# EAGLE board FinalSchematic1.0-Bigger (EAGLE 9.6.2)
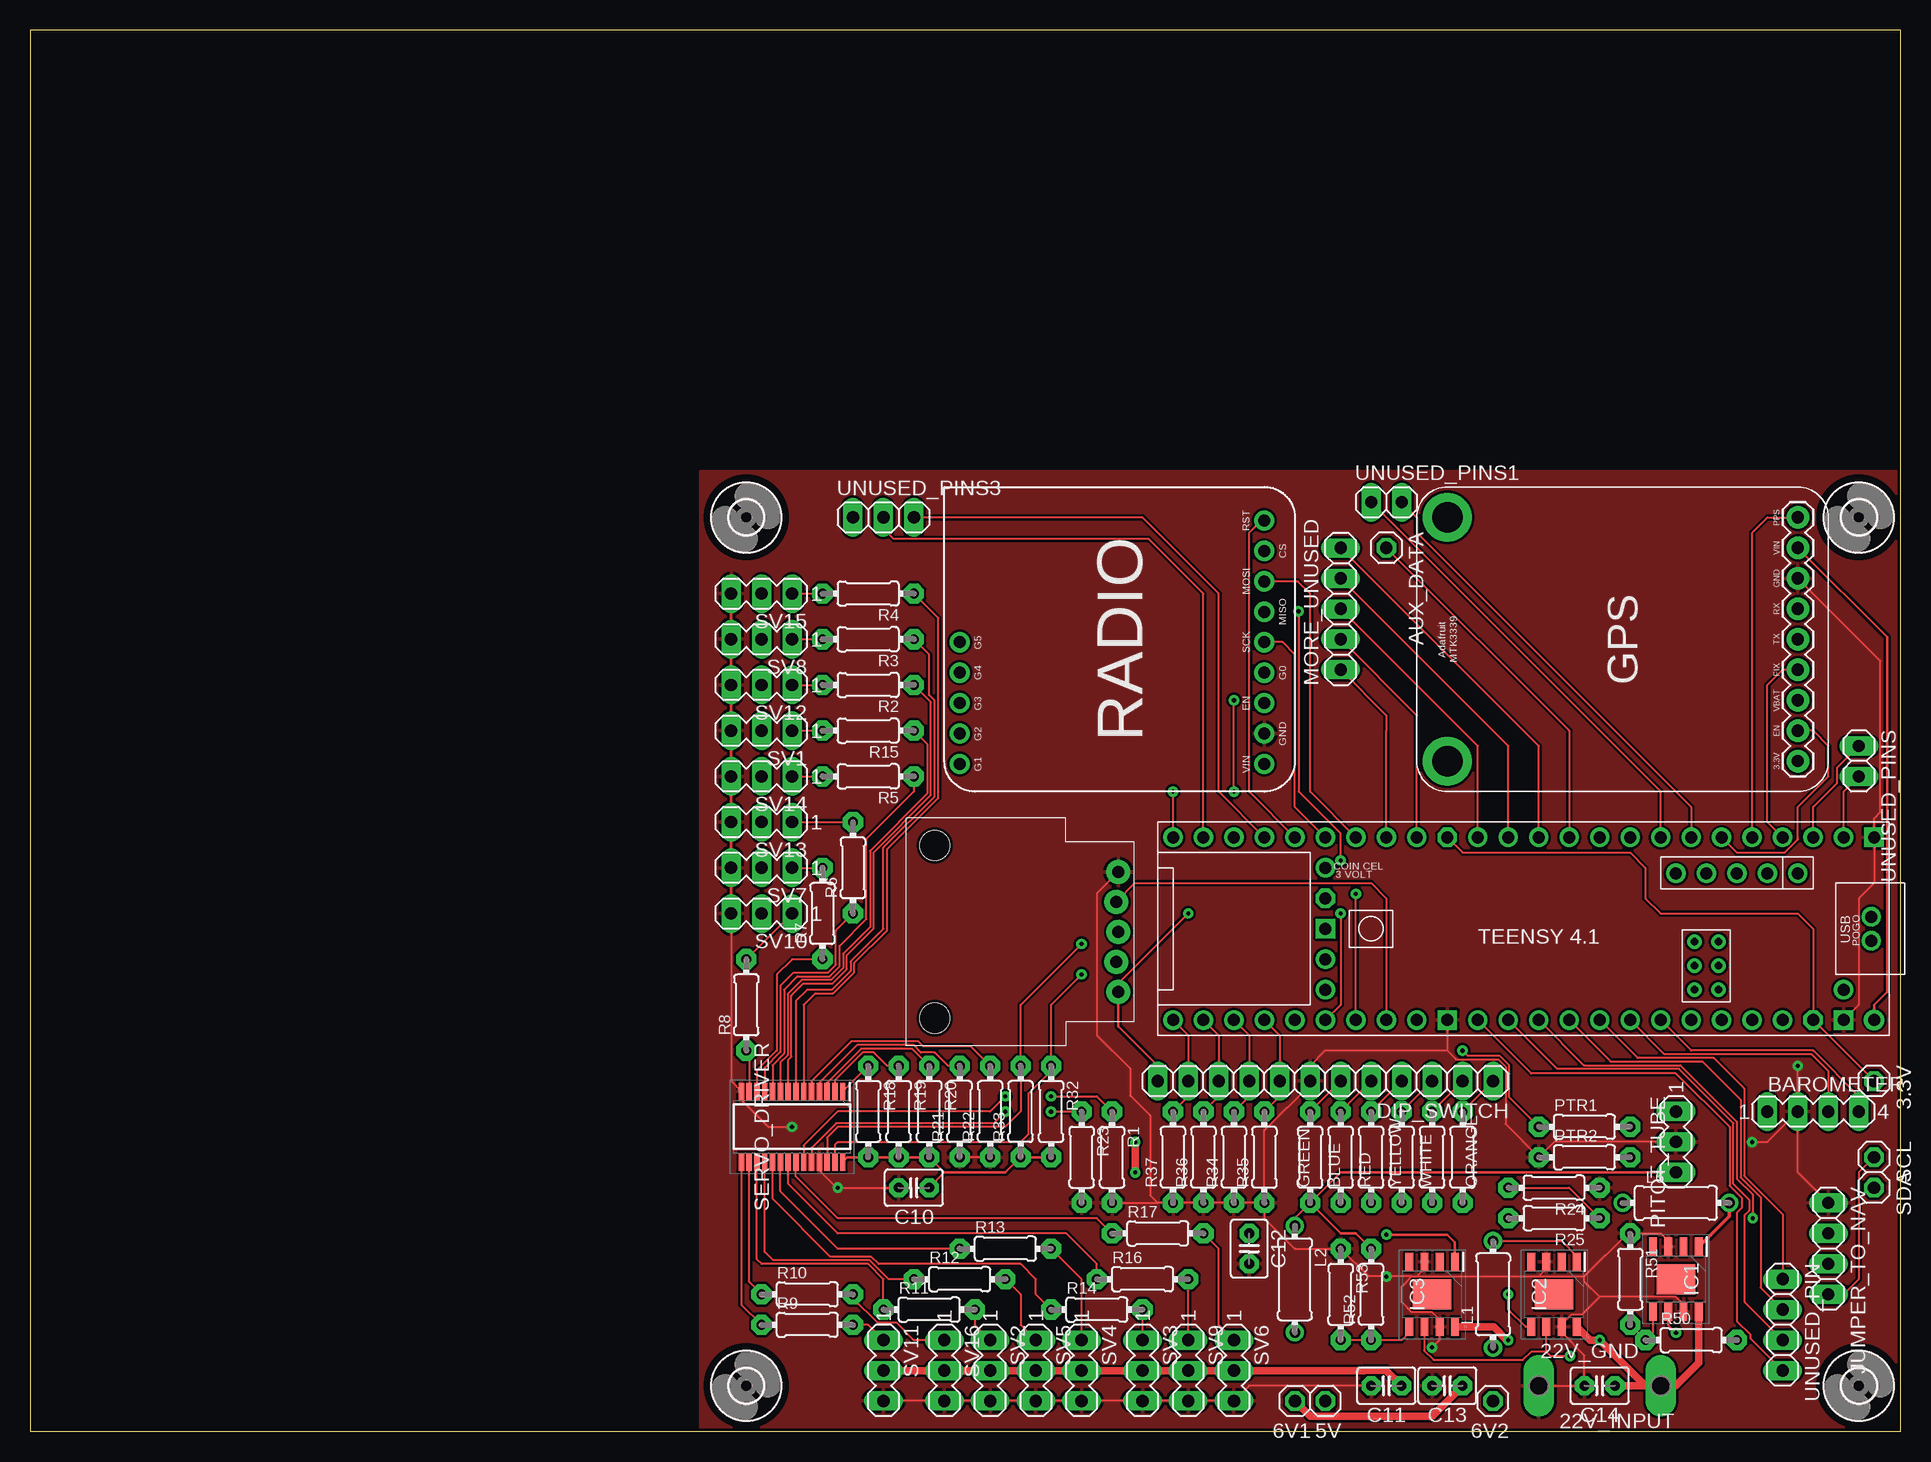
[diagram p0: board, top side]
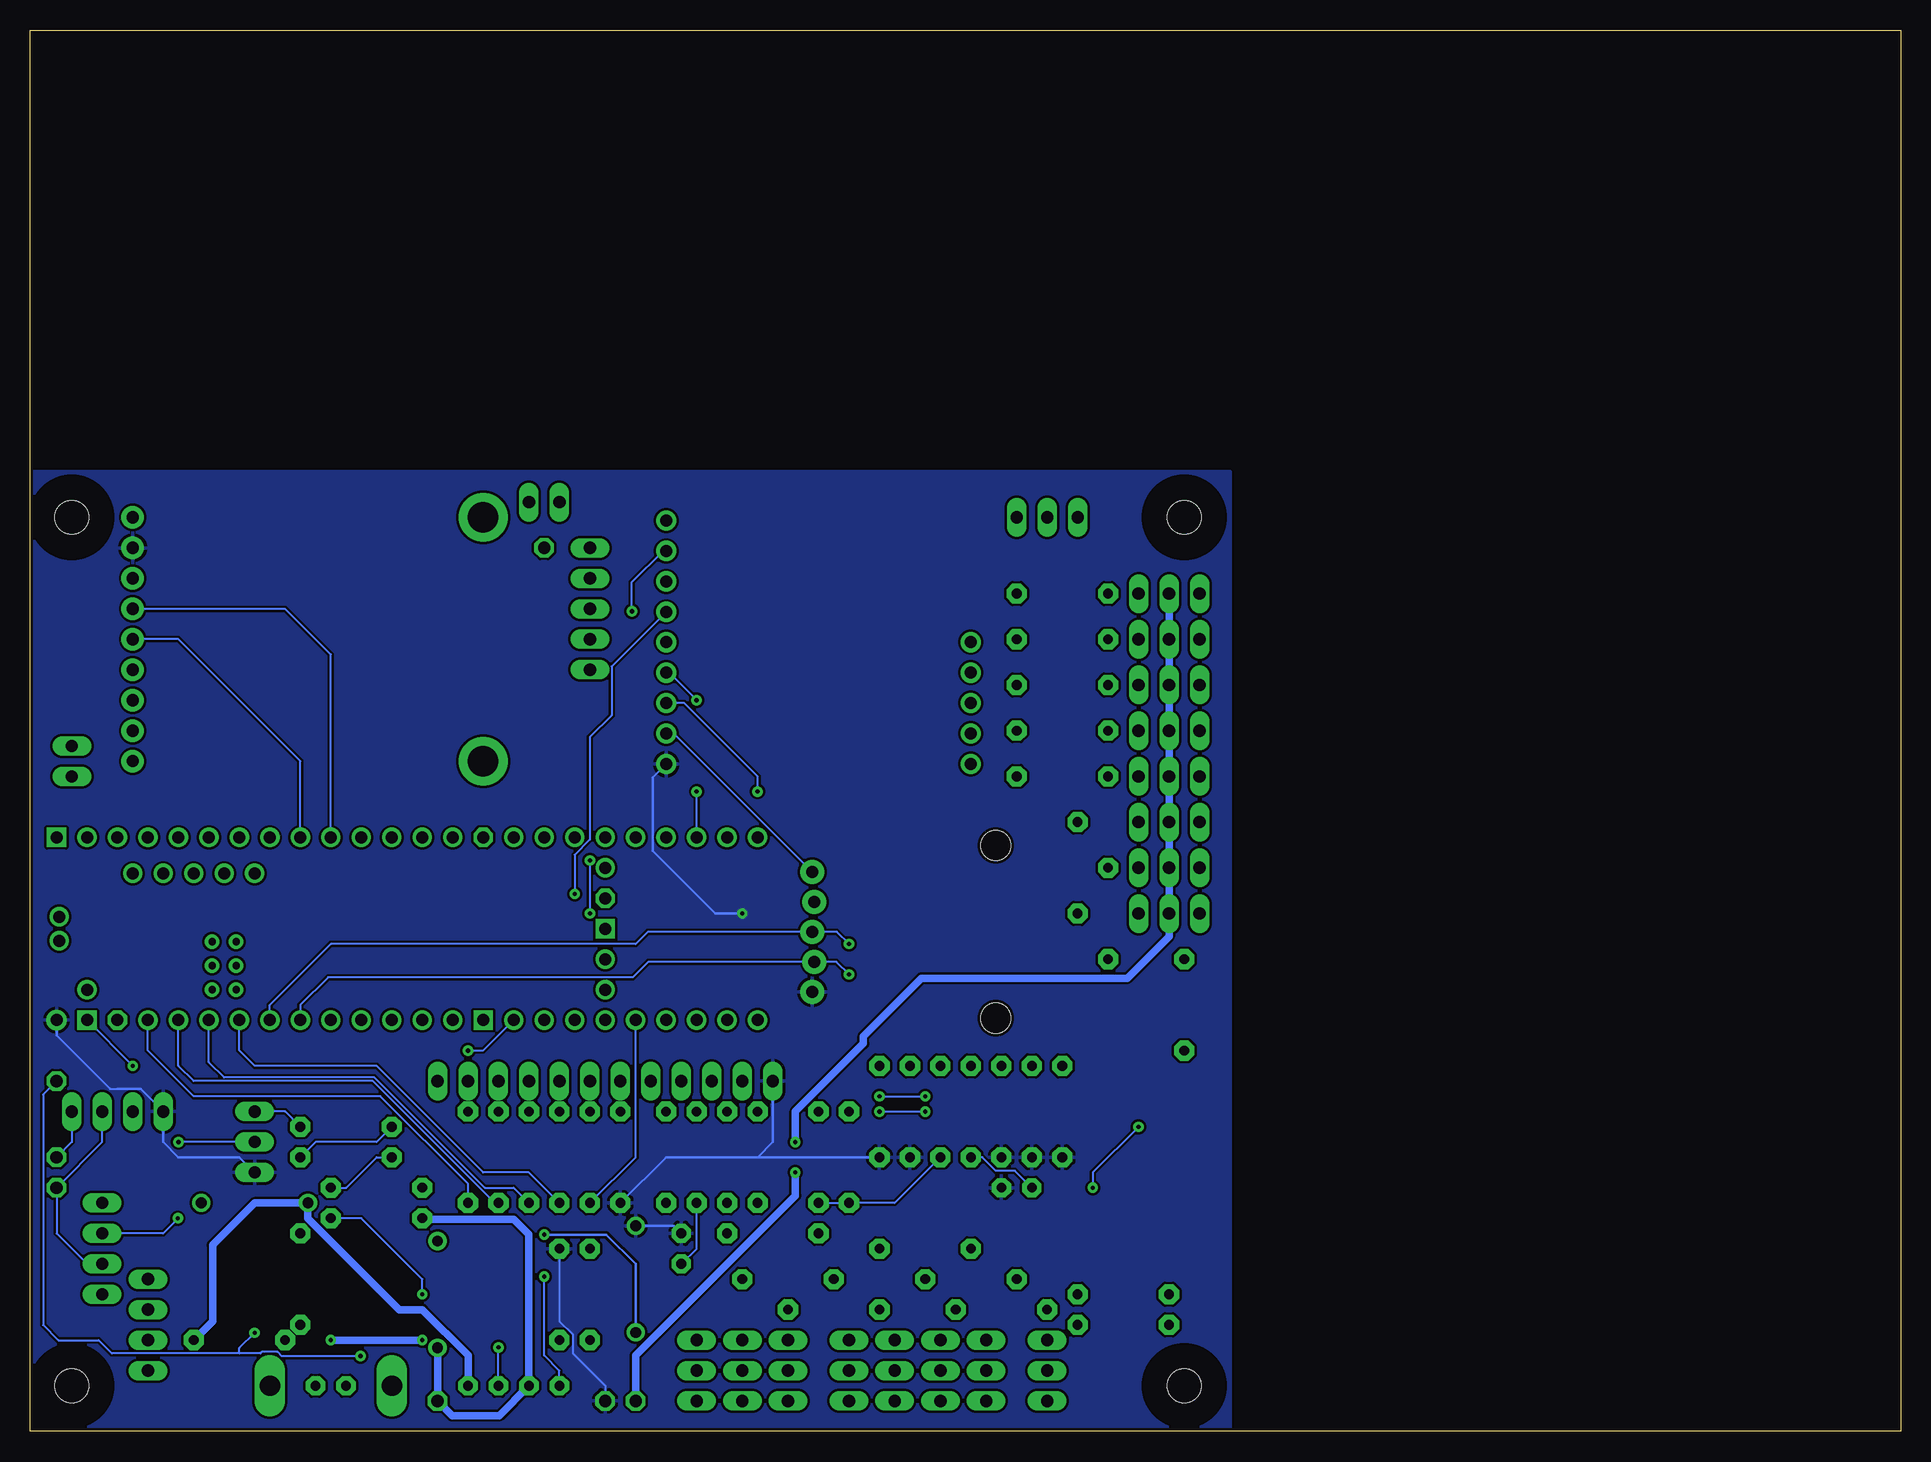
[diagram p1: board, bottom side, seen from below]

Size 155.88 x 116.83 mm. Coordinates in mm from the lower left corner, seen from the top.
Outline: 0,0 155.88,0 155.88,116.83 0,116.83 0,0
Copper layers (1*16): Top 0.035mm / dielectric 1.5mm / Bottom 0.035mm
Design rules "SparkFun": minimum track width 8mil, minimum drill 20mil, track to track 8mil, track to pad 8mil, pad to pad 8mil, via to via 8mil, smd to smd 8mil, copper to edge 10mil, drill to drill 8mil, minimum pad ring 12mil, minimum via ring 10mil, stop-mask expansion 4mil, vias tented up to drill 25mil, thermal gap 10mil

## Footprints (pad centres in the part's own frame; a part is rotated, then mirrored left to right if it is on the bottom)
1X01 = drill 1.016 octagon: 1 0,0
P1-17Y = drill 1.702 pad 2.121 long: TP 0,0
MA04-1 = drill 1.016 long: 1 -3.81,0; 2 -1.27,0; 3 1.27,0; 4 3.81,0
0204/7 = drill 0.813 pad 1.676 octagon: 1 -3.81,0; 2 3.81,0
C2.5-3 = drill 0.813 pad 1.6 octagon: 1 -1.27,0; 2 1.27,0
1X12 = drill 1.016 long: 1 -13.97,0; 2 -11.43,0; 3 -8.89,0; 4 -6.35,0; 5 -3.81,0; 6 -1.27,0; 7 1.27,0; 8 3.81,0; 9 6.35,0; 10 8.89,0; 11 11.43,0; 12 13.97,0
ADAFRUIT_MTK3339_GPS = drill 1.016 pad 1.88: 3.3V 2.54,2.54; EN 5.08,2.54; FIX 10.16,2.54; GND 17.78,2.54; PPS 22.86,2.54; RX 15.24,2.54; TX 12.7,2.54; VBAT 7.62,2.54; VIN 20.32,2.54 | drill 2.54 pad 4.064: P$1 22.86,31.75; P$2 2.54,31.75
SOIC127P600X170-9N = smd 1.525 x 0.65: 1 -2.712,1.905; 2 -2.712,0.635; 3 -2.712,-0.635; 4 -2.712,-1.905; 5 2.712,-1.905; 6 2.712,-0.635; 7 2.712,0.635; 8 2.712,1.905 | smd 2.51 x 3.2: 9 0,0
1X04 = drill 1.016 long: 1 -3.81,0; 2 -1.27,0; 3 1.27,0; 4 3.81,0
TFI0307 = drill 0.9 pad 1.5: 1 -4.445,0; 2 4.445,0
1X05 = drill 1.016 long: 1 -5.08,0; 2 -2.54,0; 3 0,0; 4 2.54,0; 5 5.08,0
MA03-1 = drill 1.016 long: 1 -2.54,0; 2 0,0; 3 2.54,0
ADAFRUIT_RFM95W_LORA_RADIO = drill 1 pad 1.676: 1 2.29,-26.67; 2 4.83,-26.67; 3 7.37,-26.67; 4 9.91,-26.67; 5 12.45,-26.67; 6 14.99,-26.67; 7 17.53,-26.67; 8 20.07,-26.67; 9 22.61,-26.67; 10 2.29,-1.27; 11 4.83,-1.27; 12 7.37,-1.27; 13 9.91,-1.27; 14 12.45,-1.27
SOP65P640X110-28N = smd 1.475 x 0.45: 1 -2.938,4.225; 2 -2.938,3.575; 3 -2.938,2.925; 4 -2.938,2.275; 5 -2.938,1.625; 6 -2.938,0.975; 7 -2.938,0.325; 8 -2.938,-0.325; 9 -2.938,-0.975; 10 -2.938,-1.625; 11 -2.938,-2.275; 12 -2.938,-2.925; 13 -2.938,-3.575; 14 -2.938,-4.225; 15 2.938,-4.225; 16 2.938,-3.575; 17 2.938,-2.925; 18 2.938,-2.275; 19 2.938,-1.625; 20 2.938,-0.975; 21 2.938,-0.325; 22 2.938,0.325; 23 2.938,0.975; 24 2.938,1.625; 25 2.938,2.275; 26 2.938,2.925; 27 2.938,3.575; 28 2.938,4.225
TEENSY41 = drill 1: 0-RX1/CS1/CRX2 -27.94,-7.62; 1-TX1/MISO1/CTX2 -25.4,-7.62; 2-OUT2 -22.86,-7.62; 3-LRCLK2 -20.32,-7.62; 4-BCLK2 -17.78,-7.62; 5-IN2 -15.24,-7.62; 6-OUT1D -12.7,-7.62; 7-RX2/OUT1A -10.16,-7.62; 8-TX2/IN1 -7.62,-7.62; 9-OUT1C -5.08,-7.62; 10-CS\MQSR -2.54,-7.62; 11-MOSI/CTX1 0,-7.62; 12-MISO/MQSL 2.54,-7.62; 13-SCK/LED 2.54,7.62; 14-A0/TX3/SPDIF_OUT 0,7.62; 15-A1/RX3/SPDIF_IN -2.54,7.62; 16-A2/RX4/SCL1 -5.08,7.62; 17-A3/TX4/SDA1 -7.62,7.62; 18-A4/SDA0 -10.16,7.62; 19-A5/SCL0 -12.7,7.62; 20-A6/TX5/LRCLK1 -15.24,7.62; 21-A7/RX5/BCLK1 -17.78,7.62; 22-A8/CTX1 -20.32,7.62; 23-A9/CRX1/MCLK1 -22.86,7.62; 24-A10/TX6/SCL2 7.62,-7.62; 25-A11/RX6/SDA2 10.16,-7.62; 26-A12/MOSI1 12.7,-7.62; 27-A13/SCK1 15.24,-7.62; 28-RX7 17.78,-7.62; 29-TX7 20.32,-7.62; 30-CRX3 22.86,-7.62; 31-CTX3 25.4,-7.62; 32-OUT1B 27.94,-7.62; 33-MCLK2 27.94,7.62; 34-RX8 25.4,7.62; 35-TX8 22.86,7.62; 36-PWM 20.32,7.62; 37-PWM 17.78,7.62; 38-A14/CS/IN1 15.24,7.62; 39-A15/CS/OUT1A 12.7,7.62; 40-A16/CS1 10.16,7.62; 41-A17/MISO1 7.62,7.62; +5V -24.13,-4.62; D+ -30.25,-1; D- -30.25,1; DM -21.59,-4.62; DP -19.05,-4.62; GND4 -16.51,-4.62; GND5 -13.97,-4.62; ON/OFF 15.24,5.08; PROGRAM 15.24,2.54; VBAT 15.24,-5.08; VUSB -27.94,5.08 | drill 1 octagon: 3V3-1 5.08,-7.62; 3V3-2 15.24,-2.54; 3V3-3 -25.4,7.62 | drill 0.6: G -15.51,3.08; LED -17.51,3.08; R+ -17.51,5.08; R- -15.51,5.08; T+ -15.51,1.08; T- -17.51,1.08 | drill 1 square: GND1 -30.48,-7.62; GND2 15.24,0; GND3 5.08,7.62; GND6 -27.94,7.62 | drill 1 pad 1.676: VIN -30.48,7.62
2,8 = hole 2.8: 0,0
ICM20948BREAKOUT = drill 1 pad 2: 2-6V -5.254,-9.427; GND 4.746,-9.427; INT 2.246,-9.227; SCL -0.254,-9.427; SDA -2.754,-9.227 | hole 2.5: -7.454,5.873; 6.946,5.873
1X02 = drill 1.016 long: 1 -1.27,0; 2 1.27,0
1X03 = drill 1.016 long: 1 -2.54,0; 2 0,0; 3 2.54,0

## Placement (x,y rotation side)
3.3V  [1X01]  153.67,29.21 270 top
5V  [1X01]  107.95,2.54 180 top
6V1  [1X01]  105.41,2.54 180 top
6V2  [1X01]  121.92,2.54 180 top
22V_GND  TPPAD1-17Y  [P1-17Y]  125.73,3.81 0 top
22V_INPUT  TPPAD1-17Y  [P1-17Y]  135.89,3.81 180 top
AUX_DATA  [1X01]  113.03,73.66 270 top
BAROMETER  [MA04-1]  148.59,26.67 0 top
BLUE  80  [0204/7]  109.22,22.86 90 top
C10  10uF  [C2.5-3]  73.66,20.32 180 top
C11  470uF  [C2.5-3]  113.03,3.81 180 top
C12  470uF  [C2.5-3]  101.6,15.24 270 top
C13  470uF  [C2.5-3]  118.11,3.81 180 top
C14  10uF  [C2.5-3]  130.81,3.81 180 top
DIP_SWITCH  [1X12]  107.95,29.21 180 top
GPSMTK3339  ADAFRUIT_MTK3339_GPS  [ADAFRUIT_MTK3339_GPS]  149.86,53.34 90 top
GREEN  150  [0204/7]  106.68,22.86 90 top
IC1  A5975D  [SOIC127P600X170-9N]  137.16,12.7 270 top
IC2  A5975D  [SOIC127P600X170-9N]  127,11.43 270 top
IC3  A5975D  [SOIC127P600X170-9N]  116.84,11.43 270 top
JUMPER_TO_NAV  [1X04]  149.86,15.24 270 top
L1  27uH  [TFI0307]  121.92,11.43 90 top
L2  27uH  [TFI0307]  105.41,12.7 270 top
L6  27uH  [TFI0307]  137.16,19.05 0 top
MORE_UNUSED  [1X05]  109.22,68.58 90 top
ORANGE  150  [0204/7]  119.38,22.86 90 top
PITOT_TUBE  [MA03-1]  137.16,24.13 270 top
PTR1  2.2K  [0204/7]  129.54,25.4 0 top
PTR2  4.3K  [0204/7]  129.54,22.86 0 top
R1  10k  [0204/7]  90.17,22.86 270 top
R2  220  [0204/7]  69.85,62.23 180 top
R3  220  [0204/7]  69.85,66.04 180 top
R4  220  [0204/7]  69.85,69.85 180 top
R5  220  [0204/7]  69.85,54.61 180 top
R6  220  [0204/7]  68.58,46.99 90 top
R7  220  [0204/7]  66.04,43.18 90 top
R8  220  [0204/7]  59.69,35.56 90 top
R9  220  [0204/7]  64.77,8.89 0 top
R10  220  [0204/7]  64.77,11.43 0 top
R11  220  [0204/7]  74.93,10.16 0 top
R12  220  [0204/7]  77.47,12.7 0 top
R13  220  [0204/7]  81.28,15.24 0 top
R14  220  [0204/7]  88.9,10.16 0 top
R15  220  [0204/7]  69.85,58.42 180 top
R16  220  [0204/7]  92.71,12.7 0 top
R17  220  [0204/7]  93.98,16.51 0 top
R18  10K  [0204/7]  69.85,26.67 270 top
R19  10K  [0204/7]  72.39,26.67 270 top
R20  10K  [0204/7]  74.93,26.67 270 top
R21  10K  [0204/7]  77.47,26.67 90 top
R22  10K  [0204/7]  80.01,26.67 90 top
R23  10k  [0204/7]  87.63,22.86 270 top
R24  1.5k  [0204/7]  127,20.32 180 top
R25  5.6k  [0204/7]  127,17.78 180 top
R32  4.7k  [0204/7]  85.09,26.67 270 top
R33  4.7k  [0204/7]  82.55,26.67 90 top
R34  2.2k  [0204/7]  100.33,22.86 90 top
R35  2.2k  [0204/7]  102.87,22.86 90 top
R36  2.2k  [0204/7]  97.79,22.86 90 top
R37  2.2k  [0204/7]  95.25,22.86 90 top
R50  5.6k  [0204/7]  138.43,7.62 0 top
R51  1.5k  [0204/7]  133.35,12.7 270 top
R52  1k  [0204/7]  111.76,11.43 90 top
R53  3k  [0204/7]  109.22,11.43 270 top
RADIO  ADAFRUIT_RFM95W_LORA_RADIO  [ADAFRUIT_RFM95W_LORA_RADIO]  76.2,53.34 90 top
RED  150  [0204/7]  111.76,22.86 90 top
SCL  [1X01]  153.67,22.86 270 top
SDA  [1X01]  153.67,20.32 270 top
SERVO_DRIVER  PCA9685PW,112  [SOP65P640X110-28N]  63.5,25.4 270 top
SV1  [MA03-1]  60.96,58.42 180 top
SV2  [MA03-1]  80.01,5.08 270 top
SV3  [MA03-1]  92.71,5.08 270 top
SV4  [MA03-1]  87.63,5.08 270 top
SV5  [MA03-1]  83.82,5.08 270 top
SV6  [MA03-1]  100.33,5.08 270 top
SV7  [MA03-1]  60.96,46.99 180 top
SV8  [MA03-1]  60.96,66.04 180 top
SV9  [MA03-1]  96.52,5.08 270 top
SV10  [MA03-1]  60.96,43.18 180 top
SV11  [MA03-1]  71.12,5.08 270 top
SV12  [MA03-1]  60.96,62.23 180 top
SV13  [MA03-1]  60.96,50.8 180 top
SV14  [MA03-1]  60.96,54.61 180 top
SV15  [MA03-1]  60.96,69.85 180 top
SV16  [MA03-1]  76.2,5.08 270 top
TEENSY4.1  TEENSY41  [TEENSY41]  123.19,41.91 180 top
U$1  [2,8]  59.69,76.2 0 top
U$2  ICM20948BREAKOUTDEVICE  [ICM20948BREAKOUT]  81.28,41.91 90 top
U$3  [2,8]  152.4,76.2 0 top
U$4  [2,8]  59.69,3.81 0 top
U$5  [2,8]  152.4,3.81 0 top
UNUSED_PIN  [1X04]  146.05,8.89 270 top
UNUSED_PINS  [1X02]  152.4,55.88 270 top
UNUSED_PINS1  [1X02]  113.03,77.47 0 top
UNUSED_PINS3  [1X03]  71.12,76.2 0 top
WHITE  90  [0204/7]  116.84,22.86 90 top
YELLOW  150  [0204/7]  114.3,22.86 90 top

## Library data of the parts
3.3V 5V 6V1 6V2 AUX_DATA DIP_SWITCH JUMPER_TO_NAV MORE_UNUSED SCL SDA UNUSED_PIN UNUSED_PINS UNUSED_PINS1 UNUSED_PINS3 = pinhead
22V_GND 22V_INPUT = testpad
BAROMETER PITOT_TUBE SV1-SV16 = con-lstb; OC_FARNELL: unknown; OC_NEWARK: unknown
BLUE GREEN ORANGE PTR1 PTR2 R1-R25 R32-R37 R50-R53 RED WHITE YELLOW = adafruit
C10-C14 = capacitor-wima
GPSMTK3339 RADIO = AERO_Eagle_Library
IC1-IC3 = A5975D; ARROW_PART_NUMBER: A5975D; ARROW_PRICE-STOCK: https://www.arrow.com/en/products/a5975d/stmicroelectronics; DESCRIPTION: STMICROELECTRONICS - A5975D - DC/DC Boost Regulator, Adjustable, AEC-Q100, 4V to 36V In, 1.235V to 35V/3A Out, 250 kHz, PowerSO-8; HEIGHT: 1.7mm; MANUFACTURER_NAME: STMicroelectronics; MANUFACTURER_PART_NUMBER: A5975D; MOUSER_PART_NUMBER: 511-A5975D; MOUSER_PRICE-STOCK: https://www.mouser.co.uk/ProductDetail/STMicroelectronics/A5975D?qs=LYO3r17CQdO66PebjUe%2FOA%3D%3D
L1 L2 L6 = rcl; SPICEPREFIX: L
SERVO_DRIVER = PCA9685PW_112; ARROW_PART_NUMBER: PCA9685PW,112; ARROW_PRICE-STOCK: https://www.arrow.com/en/products/pca9685pw112/nxp-semiconductors; DESCRIPTION: 16-channel, 12-bit PWM Fm+ I2C-bus LED controller; HEIGHT: 1.1mm; MANUFACTURER_NAME: NXP; MANUFACTURER_PART_NUMBER: PCA9685PW,112; MOUSER_PART_NUMBER: 771-PCA9685PW,112; MOUSER_PRICE-STOCK: https://www.mouser.co.uk/ProductDetail/NXP-Semiconductors/PCA9685PW112/?qs=6YAT8rHPFU9wZqiAeiOMZw%3D%3D
TEENSY4.1 = teensy
U$1 U$3-U$5 = holes
U$2 = ICM20948 BREAKOUT

## Nets
3.3V: 3.3V.1 IC1.6 IC2.6 IC3.6 TEENSY4.1.3V3-1 TEENSY4.1.3V3-3
5V: 5V.1 BAROMETER.1 C10.1 C12.1 DIP_SWITCH.12 GPSMTK3339.VIN GREEN.1 L2.1 PITOT_TUBE.3 R18.2 R19.2 R20.2 R32.2 R33.1 R52.2 RADIO.1 SERVO_DRIVER.28 TEENSY4.1.VIN U$2.2-6V
AUX_DATA: AUX_DATA.1 TEENSY4.1.9-OUT1C
B_LED: BLUE.1 TEENSY4.1.37-PWM
DIP1: DIP_SWITCH.11 R37.2 TEENSY4.1.33-MCLK2
DIP2: DIP_SWITCH.10 R36.2 TEENSY4.1.34-RX8
DIP3: DIP_SWITCH.9 R34.2 TEENSY4.1.35-TX8
DIP4: DIP_SWITCH.8 R35.2 TEENSY4.1.36-PWM
GND: 22V_GND.TP BAROMETER.2 C10.2 C11.2 C12.2 C13.2 C14.2 DIP_SWITCH.7 GPSMTK3339.GND IC1.3 IC1.7 IC2.3 IC2.7 IC3.3 IC3.7 JUMPER_TO_NAV.1 PITOT_TUBE.2 PTR2.1 R1.2 R21.1 R22.1 R23.2 R24.1 R34.1 R35.1 R36.1 R37.1 R51.1 R53.1 RADIO.2 SERVO_DRIVER.14 SERVO_DRIVER.25 SV1.3 SV2.3 SV3.3 SV4.3 SV5.3 SV6.3 SV7.3 SV8.3 SV9.3 SV10.3 SV11.3 SV12.3 SV13.3 SV14.3 SV15.3 SV16.3 TEENSY4.1.GND1 TEENSY4.1.GND3 TEENSY4.1.GND6 U$2.GND
GPS_EN: GPSMTK3339.EN TEENSY4.1.4-BCLK2
GPS_FIX: GPSMTK3339.FIX TEENSY4.1.2-OUT2
GPS_PPS: GPSMTK3339.PPS TEENSY4.1.3-LRCLK2
IMU_INT: TEENSY4.1.40-A16/CS1 U$2.INT
MISO1: RADIO.6 TEENSY4.1.39-A15/CS/OUT1A
MOSI1: RADIO.7 TEENSY4.1.26-A12/MOSI1
N$1: DIP_SWITCH.4 RED.2
N$2: R14.2 SV3.1
N$3: BLUE.2 DIP_SWITCH.5
N$4: PITOT_TUBE.1 PTR1.2
N$5: 22V_INPUT.TP C14.1 IC1.8 IC2.8 IC3.8
N$6: IC3.1 L2.2
N$7: DIP_SWITCH.6 GREEN.2
N$8: IC1.1 L6.2
N$9: IC1.5 R50.1 R51.2
N$10: DIP_SWITCH.3 YELLOW.2
N$11: DIP_SWITCH.2 WHITE.2
N$12: IC2.1 L1.2
N$14: R23.1 SERVO_DRIVER.24
N$15: R1.1 SERVO_DRIVER.23
N$16: DIP_SWITCH.1 ORANGE.2
N$18: IC3.5 R52.1 R53.2
N$19: IC2.5 R24.2 R25.1
N$43: R10.2 SV16.1
N$72: R22.2 SERVO_DRIVER.5
N$73: R21.2 SERVO_DRIVER.4
N$74: R20.1 SERVO_DRIVER.3
N$75: R19.1 SERVO_DRIVER.2
N$76: R18.1 SERVO_DRIVER.1
N$81: R6.2 SV13.1
N$82: R4.2 SV15.1
N$85: R3.2 SV8.1
N$88: R7.2 SV7.1
N$91: R11.2 SV2.1
N$94: R15.2 SV1.1
N$97: R2.2 SV12.1
N$100: R5.2 SV14.1
N$105: R9.2 SV11.1
N$108: R8.2 SV10.1
N$109: R12.2 SV5.1
N$112: R16.2 SV9.1
N$115: R17.2 SV6.1
N$118: R13.2 SV4.1
O_LED: ORANGE.1 TEENSY4.1.23-A9/CRX1/MCLK1
OUTPUT_BUCK1: 6V1.1 C13.1 L6.1 R50.2 SV1.2 SV7.2 SV8.2 SV10.2 SV12.2 SV13.2 SV14.2 SV15.2
OUTPUT_BUCK2: 6V2.1 C11.1 L1.1 R25.2 SV2.2 SV3.2 SV4.2 SV5.2 SV6.2 SV9.2 SV11.2 SV16.2
PIN0: TEENSY4.1.0-RX1/CS1/CRX2 UNUSED_PINS.2
PIN1: TEENSY4.1.1-TX1/MISO1/CTX2 UNUSED_PINS.1
PIN5: TEENSY4.1.5-IN2 UNUSED_PINS1.2
PIN6: TEENSY4.1.6-OUT1D UNUSED_PINS1.1
PIN10: MORE_UNUSED.5 TEENSY4.1.10-CS\MQSR
PIN11: MORE_UNUSED.4 TEENSY4.1.11-MOSI/CTX1
PIN12: MORE_UNUSED.3 TEENSY4.1.12-MISO/MQSL
PIN13: TEENSY4.1.13-SCK/LED UNUSED_PIN.4
PIN14: TEENSY4.1.14-A0/TX3/SPDIF_OUT UNUSED_PIN.3
PIN16: TEENSY4.1.16-A2/RX4/SCL1 UNUSED_PIN.2
PIN17: TEENSY4.1.17-A3/TX4/SDA1 UNUSED_PIN.1
PIN24: MORE_UNUSED.2 TEENSY4.1.24-A10/TX6/SCL2
PIN25: MORE_UNUSED.1 TEENSY4.1.25-A11/RX6/SDA2
PIN29: TEENSY4.1.29-TX7 UNUSED_PINS3.3
PIN31: TEENSY4.1.31-CTX3 UNUSED_PINS3.2
PT_ANLGPIN: PTR1.1 PTR2.2 TEENSY4.1.41-A17/MISO1
PWM0: R4.1 SERVO_DRIVER.6
PWM1: R3.1 SERVO_DRIVER.7
PWM2: R2.1 SERVO_DRIVER.8
PWM3: R15.1 SERVO_DRIVER.9
PWM4: R5.1 SERVO_DRIVER.10
PWM5: R6.1 SERVO_DRIVER.11
PWM6: R7.1 SERVO_DRIVER.12
PWM7: R8.1 SERVO_DRIVER.13
PWM8: R9.1 SERVO_DRIVER.15
PWM9: R10.1 SERVO_DRIVER.16
PWM10: R11.1 SERVO_DRIVER.17
PWM11: R12.1 SERVO_DRIVER.18
PWM12: R14.1 SERVO_DRIVER.19
PWM13: R13.1 SERVO_DRIVER.20
PWM14: R16.1 SERVO_DRIVER.21
PWM15: R17.1 SERVO_DRIVER.22
R_LED: RED.1 TEENSY4.1.20-A6/TX5/LRCLK1
RADIO_CS: RADIO.8 TEENSY4.1.38-A14/CS/IN1
RADIO_EN: RADIO.3 TEENSY4.1.32-OUT1B
RADIO_INT: RADIO.4 TEENSY4.1.30-CRX3
RADIO_RST: RADIO.9 TEENSY4.1.28-RX7
RX2: GPSMTK3339.TX TEENSY4.1.7-RX2/OUT1A
SCK1: RADIO.5 TEENSY4.1.27-A13/SCK1
SCL: BAROMETER.4 JUMPER_TO_NAV.4 R33.2 SCL.1 SERVO_DRIVER.26 TEENSY4.1.19-A5/SCL0 U$2.SCL
SDA: BAROMETER.3 JUMPER_TO_NAV.3 R32.1 SDA.1 SERVO_DRIVER.27 TEENSY4.1.18-A4/SDA0 U$2.SDA
SELECT_PIN: JUMPER_TO_NAV.2 TEENSY4.1.15-A1/RX3/SPDIF_IN
TX2: GPSMTK3339.RX TEENSY4.1.8-TX2/IN1
W_LED: TEENSY4.1.22-A8/CTX1 WHITE.1
Y_LED: TEENSY4.1.21-A7/RX5/BCLK1 YELLOW.1

## Tracks (layer width: path | path; a pad name or v marks a point on that pad's centre or on a via)
3.3V  (via drill 0.35)
  Top 0.152: 3.3V.1 TEENSY4.1.3V3-3 148.59,41.91 147.32,43.18 135.89,43.18 134.62,44.45 134.62,46.99 133.35,48.26 119.38,48.26 TEENSY4.1.3V3-1 | v137.16,8.23 136.53,8.87 IC1.6 | v128.34,6.28 126.73,6.28 126.37,6.64 | 126.37,6.64 125.09,6.64 124.4,5.96 116.96,5.96 116.18,6.74 116.18,8.55 116.21,8.57 IC3.6 | 126.37,6.64 126.37,6.65 IC2.6
  Bottom 0.152: 138.43,6.5 136.67,6.5 136.53,6.64 135.25,6.64 134.89,6.28 v128.34,6.28 | 138.43,6.5 149.05,6.5 150.17,7.62 153.52,7.62 154.79,8.89 154.79,28.09 3.3V.1 | 138.43,6.5 138.43,6.96 v137.16,8.23
5V  (via drill 0.35)
  Top 0.203: R52.2 110.49,16.51 109.22,16.51 GREEN.1 | PITOT_TUBE.3 109.22,21.59 GREEN.1 | GPSMTK3339.VIN 154.76,66.22 154.76,36.65 153.67,35.56 TEENSY4.1.VIN | v96.52,43.18 90.71,37.37 U$2.2-6V 90.71,33.75 93.98,30.48 DIP_SWITCH.12 | R32.2 R33.1 81.28,21.59 76.2,21.59 | C10.1 76.2,21.59 | 76.2,21.59 R20.2 R19.2 R18.2 68.12,22.86 SERVO_DRIVER.28 | GREEN.1 105.41,17.78 L2.1
  Bottom 0.152: 149.2,28.55 148.59,28.55 | 5V.1 107.95,3.81 110.64,6.5 110.64,8.08 111.76,9.2 R52.2
  Bottom 0.203: TEENSY4.1.VIN 153.67,33.02 149.2,28.55 | 148.59,28.55 146.66,28.55 BAROMETER.1 144.78,24.13 143.51,22.86 138.43,22.86 PITOT_TUBE.3 | C12.1 102.23,17.14 L2.1 | R32.2 95.25,22.86 | RADIO.1 103.99,54.51 103.99,48.41 98.75,43.18 v96.52,43.18 | 95.25,22.86 93.98,24.13 DIP_SWITCH.12 | 95.25,22.86 102.87,22.86 GREEN.1
  pour Bottom: 55.88,80.01 156.21,80.01 156.21,0 55.88,0
AUX_DATA
  Top 0.152: AUX_DATA.1 128.27,58.42 TEENSY4.1.9-OUT1C
B_LED
  Bottom 0.152: BLUE.1 105.41,22.86 TEENSY4.1.37-PWM
DIP1
  Top 0.152: TEENSY4.1.33-MCLK2 96.52,33.02 DIP_SWITCH.11 96.52,27.94 R37.2
DIP2
  Top 0.152: TEENSY4.1.34-RX8 99.06,33.02 DIP_SWITCH.10 99.06,27.94 R36.2
DIP3
  Top 0.152: TEENSY4.1.35-TX8 101.6,33.02 DIP_SWITCH.9 101.6,27.94 R34.2
DIP4
  Top 0.152: TEENSY4.1.36-PWM 104.14,33.02 DIP_SWITCH.8 104.14,27.94 R35.2
GND  (via drill 0.35)
  Top 0.152: R35.1 R34.1 R36.1 R37.1 93.98,19.05 | TEENSY4.1.GND3 118.11,31.75 | 118.11,31.75 107.95,31.75 106.68,30.48 DIP_SWITCH.7 106.68,28.9 102.87,25.09 R35.1 | U$2.GND 88.9,44.85 88.9,33.02 91.67,30.25 91.67,28.02 93.34,26.34 93.34,19.68 93.98,19.05 | BAROMETER.2 v147.32,30.48 | 125.73,12.91 126.37,13.55 IC2.3 | 115.57,12.91 125.73,12.91 | IC3.3 116.21,13.55 115.57,12.91 | IC1.7 137.8,10.58 137.16,11.22 130.81,11.22 | IC1.3 136.53,15.88 135.89,16.51 R51.1 133.14,16.51 129.54,12.91 | R35.1 102.87,17.78 105.41,15.24 R53.1 111.55,12.91 v113.03,12.91 115.15,12.91 | 115.15,12.91 115.57,12.91 | 115.15,12.91 114.3,12.07 114.3,10.79 115.15,9.95 116.84,9.95 117.47,9.31 IC3.7 117.47,7.64 v116.84,7.01 | 130.81,11.22 129.35,9.76 128.46,9.76 127.63,8.93 IC2.7 127.63,8.26 129.54,6.35 C14.2 22V_GND.TP | R22.1 R21.1 | SV15.3 SV8.3 SV12.3 SV1.3 SV14.3 SV13.3 SV7.3 SV10.3 58.42,29.21 59.28,28.36 SERVO_DRIVER.14 59.42,28.19 59.42,27.48 61.51,25.4 v63.5,25.4 | C11.2 101.6,3.81 SV6.3 SV9.3 SV3.3 SV4.3 SV5.3 SV2.3 SV16.3 SV11.3 | PITOT_TUBE.2 127,24.13 PTR2.1 122.96,25.63 122.96,30.4 122.35,31.01 118.85,31.01 118.11,31.75 | v143.51,24.13 144.78,24.13 BAROMETER.2 | 130.81,11.22 129.54,12.49 129.54,12.91 | 125.73,12.91 129.54,12.91 | SERVO_DRIVER.25 65.92,22.32 65.92,21.61 67.21,20.32 v67.31,20.32 C10.2 | R1.2 93.98,19.05 | GPSMTK3339.GND 154.2,64.24 154.2,51.64 153.67,51.1 TEENSY4.1.GND1 153.67,45.72 152.4,44.45 152.4,35.56 TEENSY4.1.GND6 | JUMPER_TO_NAV.1 147.32,21.59 BAROMETER.2
  Bottom 0.152: TEENSY4.1.GND6 v147.32,30.48 | RADIO.2 102.22,58.17 U$2.GND | R1.2 R23.2 83.82,19.05 R22.1 | PITOT_TUBE.2 v143.51,24.13 | v63.5,25.4 67.31,21.59 v67.31,20.32 | C10.2 73.81,21.74 75.39,21.74 76.51,22.86 R21.1 | R24.1 129.54,20.32 127,22.86 PTR2.1 | C12.2 100.33,15.24 R34.1 | C11.2 111.76,5.08 113.03,6.35 v113.03,12.91 | C13.2 v116.84,7.01
  pour Top: 55.88,80.01 156.21,80.01 156.21,0 55.88,0
GPS_EN
  Top 0.152: TEENSY4.1.4-BCLK2 142.24,48.26 146.24,48.26 147.32,49.34 147.32,49.41 147.32,49.53 147.32,52.07 149.86,54.61 149.86,57.15 148.59,58.42 GPSMTK3339.EN
GPS_FIX
  Top 0.152: TEENSY4.1.2-OUT2 144.78,50.8 144.78,62.23 146.05,63.5 GPSMTK3339.FIX
GPS_PPS
  Top 0.152: TEENSY4.1.3-LRCLK2 143.51,74.93 144.78,76.2 GPSMTK3339.PPS
IMU_INT
  Top 0.152: U$2.INT 92.07,45.72 111.76,45.72 113.03,44.45 TEENSY4.1.40-A16/CS1
MISO1  (via drill 0.35)
  Top 0.152: TEENSY4.1.39-A15/CS/OUT1A v110.49,44.8
  Bottom 0.152: v110.49,44.8 110.49,48.07 109.22,49.34 109.22,57.89 107.42,59.69 107.42,63.78 RADIO.6
MOSI1
  Top 0.152: TEENSY4.1.26-A12/MOSI1 106.68,53.34 106.68,69.85 105.66,70.87 RADIO.7
N$1
  Top 0.152: DIP_SWITCH.4 RED.2
N$2
  Top 0.152: SV3.1 R14.2
N$3
  Top 0.152: DIP_SWITCH.5 BLUE.2
N$4
  Bottom 0.152: PTR1.2 134.62,26.67 PITOT_TUBE.1
N$5  (via drill 0.35)
  Top 0.305: C14.1 134.62,3.81
  Top 0.61: 22V_INPUT.TP 137.16,3.81 139.06,5.71 IC1.8 | 22V_INPUT.TP C14.1 | 22V_INPUT.TP 134.62,3.81 v130.81,7.62 130,7.62 IC2.8 | v123.19,7.62 123.06,7.62 121.97,8.72 121.92,8.72 IC3.8
  Bottom 0.61: v130.81,7.62 v123.19,7.62
N$6  (via drill 0.35)
  Top 0.203: v113.03,16.41 118.11,16.41 118.75,15.78 IC3.1
  Bottom 0.152: 105.41,8.89 L2.2
  Bottom 0.203: v113.03,16.41 107.85,16.41 105.41,13.97 105.41,8.89
N$7
  Top 0.152: DIP_SWITCH.6 GREEN.2
N$8
  Top 0.305: L6.2 141.6,17.95 IC1.1
N$9
  Top 0.152: IC1.5 135.25,8.26 R50.1 R51.2
N$10
  Top 0.152: DIP_SWITCH.3 YELLOW.2
N$11
  Top 0.152: DIP_SWITCH.2 WHITE.2
N$12
  Top 0.152: L1.2 127.63,15.88 128.91,14.61 IC2.1
N$14  (via drill 0.35)
  Top 0.152: v81.28,26.67 80.31,25.7 67.18,25.7 65.12,23.65 SERVO_DRIVER.24 | v85.09,26.67 R23.1
  Bottom 0.152: v85.09,26.67 v81.28,26.67
N$15  (via drill 0.35)
  Top 0.152: v81.28,27.94 80.01,26.67 67.31,26.67 64.48,23.84 SERVO_DRIVER.23 | v85.09,27.94 88.9,27.94 R1.1
  Bottom 0.152: v85.09,27.94 v81.28,27.94
N$16
  Top 0.152: ORANGE.2 DIP_SWITCH.1
N$18
  Top 0.152: IC3.5 114.94,8.26 114.3,7.62 R52.1 R53.2
N$19  (via drill 0.35)
  Top 0.152: R24.2 128.27,20.32 R25.1 | v123.19,11.43 123.19,10.16 124.63,8.72 IC2.5
  Bottom 0.152: v123.19,11.43 123.19,12.7 128.27,17.78 R25.1
N$43
  Top 0.152: SV16.1 73.66,7.62 72.24,9.04 70.66,9.04 68.58,11.12 R10.2
N$72
  Top 0.152: SERVO_DRIVER.5 65.12,29.21 68.43,32.51 74.04,32.51 74.44,32.11 78.38,32.11 R22.2
N$73
  Top 0.152: SERVO_DRIVER.4 65.78,29.05 68.94,32.21 73.63,32.21 74.24,31.6 75.39,31.6 76.51,30.48 R21.2
N$74
  Top 0.152: R20.1 73.66,31.75 73.56,31.85 73.51,31.9 69.26,31.9 66.42,29.07 SERVO_DRIVER.3
N$75
  Top 0.152: SERVO_DRIVER.2 67.08,29.21 67.08,29.29 69.39,31.6 70.31,31.6 71.43,30.48 R19.1
N$76
  Top 0.152: SERVO_DRIVER.1 67.73,28.36 R18.1
N$81
  Top 0.152: SV13.1 R6.2
N$82
  Top 0.152: SV15.1 R4.2
N$85
  Top 0.152: SV8.1 R3.2
N$88
  Top 0.152: SV7.1 R7.2
N$91
  Top 0.152: R11.2 78.74,8.89 SV2.1
N$94
  Top 0.152: SV1.1 R15.2
N$97
  Top 0.152: SV12.1 R2.2
N$100
  Top 0.152: SV14.1 R5.2
N$105
  Top 0.152: SV11.1 69.85,8.89 R9.2
N$108
  Top 0.152: SV10.1 R8.2
N$109
  Top 0.152: SV5.1 82.55,8.89 82.55,11.43 R12.2
N$112
  Top 0.152: SV9.1 R16.2
N$115
  Top 0.152: SV6.1 99.06,8.89 99.06,15.24 R17.2
N$118
  Top 0.152: SV4.1 87.63,12.7 R13.2
O_LED
  Bottom 0.152: ORANGE.1 119.38,20.63 126.69,27.94 142.24,27.94 146.05,31.75 TEENSY4.1.23-A9/CRX1/MCLK1
OUTPUT_BUCK1  (via drill 0.35)
  Top 0.61: 6V1.1 106.68,1.27 116.84,1.27 C13.1 | v92.1,21.59 v92.1,24.13
  Bottom 0.61: SV15.2 SV8.2 SV12.2 SV1.2 SV14.2 SV13.2 SV7.2 SV10.2 60.96,41.28 64.45,37.78 81.6,37.78 86.44,32.94 86.44,32.34 92.1,26.67 v92.1,24.13 | v92.1,21.59 92.1,19.66 105.41,6.35 6V1.1 | R50.2 140.67,9.19 140.67,15.54 137.16,19.05 L6.1 132.72,17.78 125.09,10.16 123.19,10.16 119.38,6.35 C13.1
OUTPUT_BUCK2
  Top 0.61: SV11.2 SV16.2 SV2.2 SV5.2 SV4.2 SV3.2 SV9.2 SV6.2 111.18,5.08 111.22,5.12 112.99,5.12 C11.1
  Bottom 0.61: L1.1 6V2.1 120.7,1.32 116.79,1.32 C11.1 114.3,16.43 115.57,17.7 123.11,17.7 R25.2
PIN0
  Top 0.152: TEENSY4.1.0-RX1/CS1/CRX2 151.13,53.34 UNUSED_PINS.2
PIN1
  Top 0.152: TEENSY4.1.1-TX1/MISO1/CTX2 148.59,52.07 150.6,54.08 150.6,55.35 UNUSED_PINS.1
PIN5
  Top 0.152: TEENSY4.1.5-IN2 138.43,52.07 115.57,74.93 115.57,76.2 UNUSED_PINS1.2
PIN6
  Top 0.152: TEENSY4.1.6-OUT1D 135.89,53.34 UNUSED_PINS1.1
PIN10
  Top 0.152: MORE_UNUSED.5 125.73,57.15 TEENSY4.1.10-CS\MQSR
PIN11
  Top 0.152: TEENSY4.1.11-MOSI/CTX1 123.19,57.15 MORE_UNUSED.4
PIN12
  Top 0.152: MORE_UNUSED.3 120.65,57.15 TEENSY4.1.12-MISO/MQSL
PIN13
  Top 0.152: TEENSY4.1.13-SCK/LED 125.09,29.84 137.16,29.84 141.63,25.37 141.63,20.48 142.63,19.48 142.63,18.62 142.24,18.23 142.24,9.2 143.36,8.08 143.36,7.77 UNUSED_PIN.4
PIN14
  Top 0.152: TEENSY4.1.14-A0/TX3/SPDIF_OUT 127.25,30.23 137.41,30.23 141.94,25.7 141.94,20.62 143.25,19.31 143.25,18.41 142.9,18.05 142.9,10.77 UNUSED_PIN.3
PIN16
  Top 0.152: TEENSY4.1.16-A2/RX4/SCL1 131.72,30.84 139.34,30.84 142.55,27.63 142.55,21.19 144.22,19.52 144.22,11.99 UNUSED_PIN.2
PIN17
  Top 0.152: TEENSY4.1.17-A3/TX4/SDA1 133.96,31.14 140.31,31.14 142.85,28.6 142.85,21.32 146.05,18.12 UNUSED_PIN.1
PIN24
  Top 0.152: TEENSY4.1.24-A10/TX6/SCL2 115.57,59.69 MORE_UNUSED.2
PIN25
  Top 0.152: TEENSY4.1.25-A11/RX6/SDA2 113.03,58.42 113.03,59.69 MORE_UNUSED.1
PIN29
  Top 0.152: TEENSY4.1.29-TX7 99.06,53.34 99.06,69.85 92.71,76.2 UNUSED_PINS3.3
PIN31
  Top 0.152: UNUSED_PINS3.2 71.12,75.23 71.96,74.4 93.24,74.4 97.79,69.85 TEENSY4.1.31-CTX3
PT_ANLGPIN  (via drill 0.35)
  Top 0.152: PTR1.1 123.27,27.86 123.27,30.53 122.48,31.32 119.81,31.32 v119.38,31.75
  Bottom 0.152: PTR1.1 127,24.13 132.08,24.13 PTR2.2 | TEENSY4.1.41-A17/MISO1 118.11,31.75 v119.38,31.75
PWM0
  Top 0.152: R4.1 75.69,67.82 75.69,53.34 75.69,52.81 71.42,48.54 71.42,41.78 68.68,39.04 68.68,38.28 66.93,36.52 65.44,36.52 64.48,35.56 SERVO_DRIVER.6
PWM1
  Top 0.152: R3.1 74.93,64.77 74.93,61.39 75.39,60.93 75.39,52.94 71.12,48.67 71.12,41.91 68.38,39.17 68.38,38.4 66.81,36.83 64.77,36.83 63.83,35.88 SERVO_DRIVER.7
PWM2
  Top 0.152: R2.1 75.08,60.81 75.08,53.06 70.31,48.29 70.31,41.94 68.07,39.7 68.07,38.53 67.64,38.1 67.48,37.93 66.88,37.34 64.44,37.34 63.45,36.35 63.45,31.25 63.18,30.97 SERVO_DRIVER.8
PWM3
  Top 0.152: SERVO_DRIVER.9 62.53,30.75 63.14,31.37 63.14,36.47 64.31,37.64 66.75,37.64 67.77,38.66 67.77,39.83 70,42.06 70,48.41 74.78,53.19 74.78,54.03 74.78,54.61 74.78,57.3 R15.1
PWM4
  Top 0.152: R5.1 73.66,53.34 69.7,49.38 69.7,42.72 67.46,40.48 67.46,38.78 66.63,37.95 63.96,37.95 62.84,36.83 62.84,31.5 61.88,30.53 SERVO_DRIVER.10
PWM5
  Top 0.152: R6.1 67.16,41.76 67.16,38.91 66.5,38.25 63.65,38.25 62.54,37.13 62.54,31.62 61.23,30.31 SERVO_DRIVER.11
PWM6
  Top 0.152: R7.1 63.5,39.37 62.23,38.1 62.23,31.75 60.58,30.09 SERVO_DRIVER.12
PWM7
  Top 0.152: R8.1 59.93,31.52 SERVO_DRIVER.13
PWM8
  Top 0.152: SERVO_DRIVER.15 59.28,10.57 R9.1
PWM9
  Top 0.152: R10.1 59.93,12.46 SERVO_DRIVER.16
PWM10
  Top 0.152: SERVO_DRIVER.17 60.58,14.36 60.96,13.97 69.85,13.97 71.12,12.7 R11.1
PWM11
  Top 0.152: R12.1 71.55,12.7 69.98,14.28 61.93,14.28 61.23,14.97 SERVO_DRIVER.18
PWM12
  Top 0.152: SERVO_DRIVER.19 61.88,19.41 66.7,14.58 70.1,14.58 70.71,13.97 82.55,13.97 83.82,12.7 83.82,11.43 R14.1
PWM13
  Top 0.152: R13.1 67.31,15.24 62.53,20.02 SERVO_DRIVER.20
PWM14
  Top 0.152: R16.1 88.9,13.97 86.36,16.51 67.31,16.51 63.18,20.64 SERVO_DRIVER.21
PWM15
  Top 0.152: R17.1 88.9,17.78 67.31,17.78 63.83,21.27 SERVO_DRIVER.22
R_LED
  Bottom 0.152: RED.1 114.3,21.59 118.11,21.59 127,30.48 137.16,30.48 138.43,31.75 TEENSY4.1.20-A6/TX5/LRCLK1
RADIO_CS  (via drill 0.35)
  Top 0.152: v109.22,43.18 109.22,35.56 TEENSY4.1.38-A14/CS/IN1 | v105.72,68.37 105.72,53.34 109.22,49.84 v109.22,47.6
  Bottom 0.152: v109.22,47.6 v109.22,43.18 | RADIO.8 103.12,73.41 105.72,70.81 v105.72,68.37
RADIO_EN  (via drill 0.35)
  Top 0.152: TEENSY4.1.32-OUT1B v95.25,53.34
  Bottom 0.152: v95.25,53.34 95.25,54.61 101.35,60.71 RADIO.3
RADIO_INT  (via drill 0.35)
  Top 0.152: v100.33,53.34 v100.33,60.96
  Bottom 0.152: TEENSY4.1.30-CRX3 v100.33,53.34 | v100.33,60.96 102.62,63.25 RADIO.4
RADIO_RST
  Top 0.152: RADIO.9 102.62,75.95 101.6,74.93 101.6,53.34 TEENSY4.1.28-RX7
RX2
  Bottom 0.152: TEENSY4.1.7-RX2/OUT1A 133.35,55.88 143.51,66.04 GPSMTK3339.TX
SCK1
  Top 0.152: RADIO.5 104.39,65.79 105.41,64.77 105.41,52.07 TEENSY4.1.27-A13/SCK1
SCL  (via drill 0.35)
  Top 0.152: BAROMETER.4 152.4,27.94 148.59,31.75 138.43,31.75 TEENSY4.1.19-A5/SCL0 | SERVO_DRIVER.26 66.42,24.52 67.31,25.4 81.28,25.4 82.55,26.67 R33.2 82.55,35.56 v87.63,40.64 | SCL.1 152.4,21.59 152.4,12.7 151.13,11.43 JUMPER_TO_NAV.4
  Bottom 0.152: TEENSY4.1.19-A5/SCL0 135.89,35.56 130.81,40.64 105.41,40.64 104.39,41.66 U$2.SCL 88.65,41.66 v87.63,40.64 | BAROMETER.4 152.4,24.13 SCL.1
SDA  (via drill 0.35)
  Top 0.152: SERVO_DRIVER.27 67.08,23.89 67.31,24.13 82.55,24.13 83.21,24.79 83.21,28.19 85.09,30.07 R32.1 85.09,35.56 v87.63,38.1 | TEENSY4.1.18-A4/SDA0 136.19,31.45 148.46,31.45 149.86,30.05 BAROMETER.3
  Bottom 0.152: TEENSY4.1.18-A4/SDA0 133.35,35.56 131.05,37.86 105.65,37.86 104.35,39.16 U$2.SDA 88.69,39.16 v87.63,38.1 | BAROMETER.3 149.86,24.13 SDA.1 153.67,16.51 151.13,13.97 JUMPER_TO_NAV.3
SELECT_PIN  (via drill 0.35)
  Top 0.152: TEENSY4.1.15-A1/RX3/SPDIF_IN 129.49,30.53 137.54,30.53 142.24,25.83 142.24,21.07 143.56,19.75 v143.56,17.78
  Bottom 0.152: JUMPER_TO_NAV.2 144.78,16.51 143.56,17.73 v143.56,17.78
TX2
  Bottom 0.152: TEENSY4.1.8-TX2/IN1 130.81,64.77 134.62,68.58 GPSMTK3339.RX
W_LED
  Bottom 0.152: WHITE.1 117.15,19.05 127.31,29.21 142.24,29.21 143.51,30.48 TEENSY4.1.22-A8/CTX1
Y_LED
  Bottom 0.152: YELLOW.1 115.57,20.32 117.98,20.32 127.18,29.52 139.7,29.52 140.97,30.79 TEENSY4.1.21-A7/RX5/BCLK1